# Altium PCB LimeSDR-Mini_2v5_Rounded.PcbDoc (part 3 of 7)
Units mm, origin at the board's own origin, x right, y up, seen from the top; angles counter-clockwise.
Board outline 69 x 31.37 mm, 8 copper layers (Top, L2, L3, L4, L5, L6, L7, Bottom), stack 1.555 mm thick; 439 components, 294 nets, 1986 pads, 831 vias.
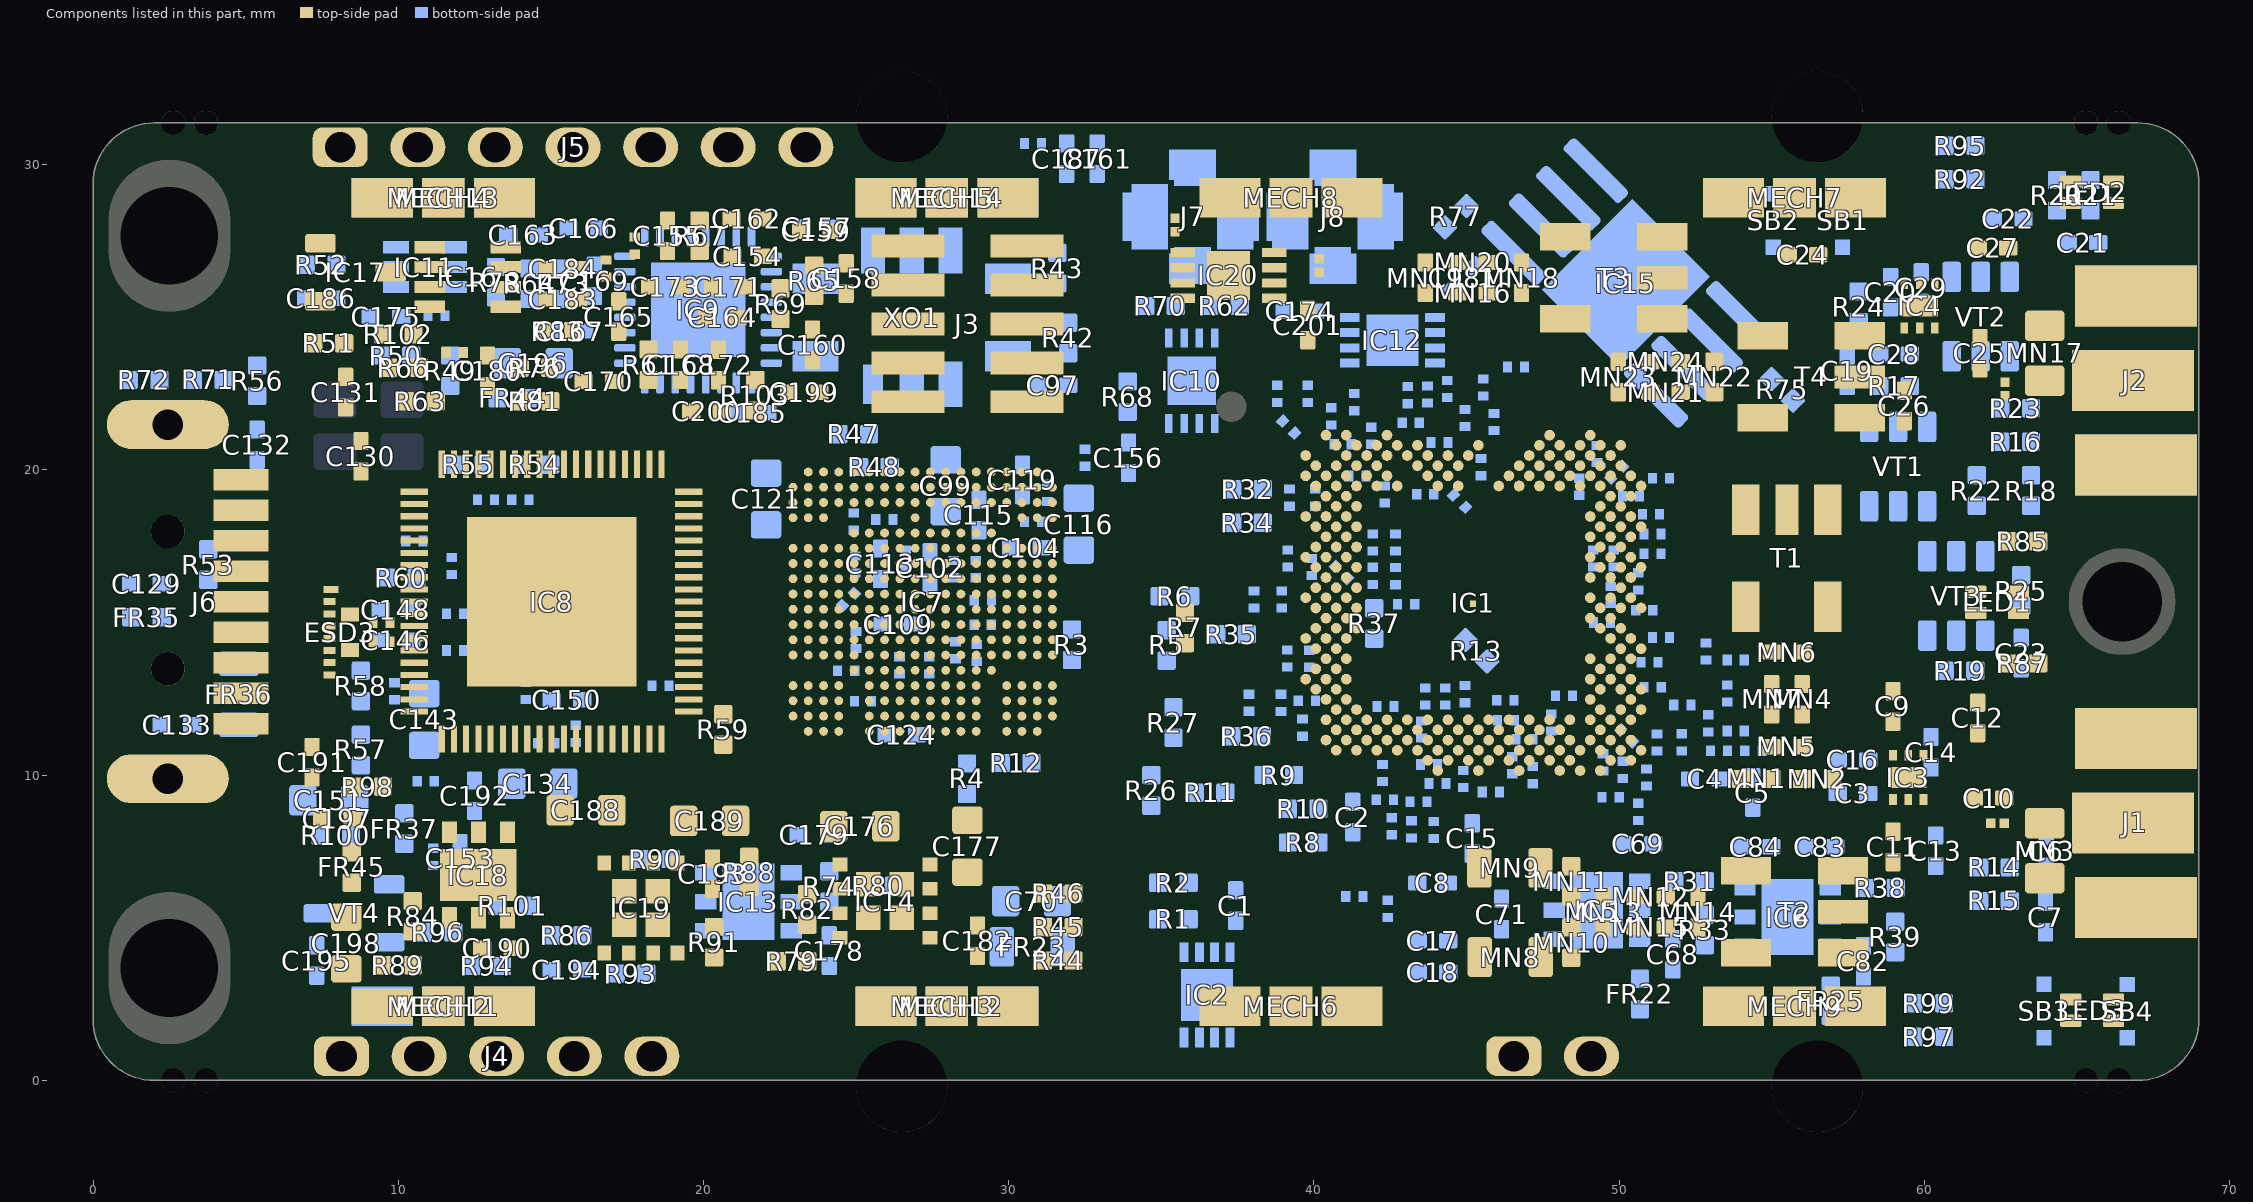
[diagram p8: the components of this part, seen from the top]

## Part data (continued)
IC14 IC19: library part LMZ20501SILR_DC-DC, Case/Package=SMD/SMT, Manufacturer="Texas Instruments", Max Input Voltage=5.5V, Max Operating Temperature=125°C, Max Output Current=1A, Max Power Dissipation=4W, Min Input Voltage=2.7V, Min Operating Temperature=-40°C, Output Voltage=3.6V, Package Quantity=3000, Quiescent Current=72nA, Supplier Part Number 1=296-40328-1-ND, Switching Frequency=3MHz, ComponentLink1Description=http://www.ti.com/lit/pdf/snaa214?src-supplier=Digi-Key, ComponentLink1URL=http://www.ti.com/lit/pdf/snaa214?src-supplier=Digi-Key, ComponentLink2Description=http://www.ti.com/lit/ds/symlink/lmz20501.pdf?src-supplier=Digi-Key, ComponentLink2URL=http://www.ti.com/lit/ds/symlink/lmz20501.pdf?src-supplier=Digi-Key, ComponentLink3Description=http://www.ti.com/lit/gpn/lmz20501?src-supplier=Mouser, ComponentLink3URL=http://www.ti.com/lit/gpn/lmz20501?src-supplier=Mouser, ComponentLink4Description=http://www.ti.com/general/docs/lit/getliterature.tsp?genericPartNumber=LMZ20501&&fileType=pdf&src-supplier=Avnet, ComponentLink4URL=http://www.ti.com/general/docs/lit/getliterature.tsp?genericPartNumber=LMZ20501&&fileType=pdf&src-supplier=Avnet, Efficiency=93%, Features=UVLO,OCP,OTP,SCP, Height=0.07inch, Lead Free="Lead Free", Length=0.14inch, Manufacturer Part Number 1=LMZ20501SILR, Mount="Surface Mount", Number of Outputs=1, Number of Pins=8, Operating Supply Voltage=5.5V, Output Type=Adjustable, Packaging="Tape and Reel", Part Description="Non-Isolated PoL Module DC DC Converter 1 Output 0.8 ~ 3.6V 1A 2.7V - 5.5V Input", Pricing 1="1=4,48000, 10=4,02000, 25=3,80040, 100=3,29350, 250=3,12464, 500=2,80372, 1000=2,54942 (USD)", RoHS=Yes, RoHS Compliant=Yes, Stock 1=8106, Supplier 1=Digi-Key, Voltage - Output 1=3.6V, Width=0.14inch
IC15: library part M25P40_with_pad, Case/Package=SOIC, Frequency=104MHz, Manufacturer=Winbond, Max Operating Temperature=85°C, Min Operating Temperature=-40°C, Supplier Part Number 1=W25Q128JVSIQ-ND, ComponentLink1Description=http://www.winbond.com/resource-files/w25q128jv%20revf%2003272018%20plus.pdf?src-supplier=Digi-Key, ComponentLink1URL=http://www.winbond.com/resource-files/w25q128jv%20revf%2003272018%20plus.pdf?src-supplier=Digi-Key, Interface=SPI,Serial, Manufacturer Part Number 1=W25Q128JVSIQ, Memory Type=FLASH,NOR, Packaging=Tray, Part Description="FLASH - NOR Memory IC 128Mb (16M x 8) SPI - Quad I/O, QPI, DTR 133 MHz 8-SOIC", Pricing 1="1=1,88000, 10=1,71400, 25=1,66760, 50=1,65880, 100=1,48280, 250=1,47852, 500=1,45618, 1000=1,39437, 5000=1,29820 (USD)", RoHS=Yes, RoHS Compliant=Yes, Stock 1=7729, Supplier 1=Digi-Key
IC16: Manufacturer="Analog Devices Inc.", Manufacturer Part Number 1=AD5662BRJZ-2REEL7, Operating Temperature="-40°C ~ 125°C", Package / Case=SOT-23-8, Supplier Part Number 1=AD5662BRJZ-2REEL7CT-ND, Voltage - Supply, Analog="2.7 V ~ 5.5 V", Architecture="String DAC", Assembly Info=NF, Category="Integrated Circuits (ICs)", ComponentLink1Description=http://www.analog.com/media/en/technical-documentation/data-sheets/AD5662.pdf, ComponentLink1URL=http://www.analog.com/media/en/technical-documentation/data-sheets/AD5662.pdf, Data Interface="SPI, DSP", Differential Output=No, INL/DNL (LSB)="±8, ±1 (Max)", Number of Bits=16, Number of D/A Converters=1, Output Type="Voltage - Buffered", Packaging="Cut Tape (CT)", Part Description="IC DAC 16BIT BUFF V-OUT SOT23-8", Part Status=Active, Pricing 1="1=7.55, 10=6.821, 100=5.6469, 500=4.91722, 1000=4.28274 (USD)", Reference Type=External, RoHS="RoHS Compliant", Settling Time=10µs, Stock 1=2784, Supplier 1=Digi-Key, Supplier Device Package=SOT-23-8, Voltage - Supply, Digital="2.7 V ~ 5.5 V"
IC17: library part VOLTAGE_REFERENCE_UNIVERSAL, Case/Package=TO-236-3, Cathode Current=1mA, Manufacturer=Diodes, Manufacturer Part Number 1=AS431ANTR-G1, Max Input Voltage=36V, Max Operating Temperature=125°C, Max Output Current=100mA, Min Operating Temperature=-40°C, Min Output Voltage=2.5V, Package Quantity=3000, Supplier Part Number 1=AS431ANTR-G1DICT-ND, Temperature Coefficient=20ppm/°C, Tolerance=0.5%, Assembly Info=NF, ComponentLink1Description=https://datasheet.ciiva.com/1177/1643148-1177233.pdf?src-supplier=Avnet, ComponentLink1URL=https://datasheet.ciiva.com/1177/1643148-1177233.pdf?src-supplier=Avnet, ComponentLink2Description=https://datasheet.ciiva.com/30002/as431-30002029.pdf?src-supplier=Avnet, ComponentLink2URL=https://datasheet.ciiva.com/30002/as431-30002029.pdf?src-supplier=Avnet, ComponentLink3Description=https://datasheet.ciiva.com/29572/as431-29572149.pdf?src-supplier=Digi-Key, ComponentLink3URL=https://datasheet.ciiva.com/29572/as431-29572149.pdf?src-supplier=Digi-Key, ComponentLink4Description=https://datasheet.ciiva.com/29572/as431-29572150.pdf?src-supplier=Digi-Key, ComponentLink4URL=https://datasheet.ciiva.com/29572/as431-29572150.pdf?src-supplier=Digi-Key, Max Output Voltage=36V, Mount="Surface Mount", Number of Pins=3, Output Current=100mA, Output Type=Adjustable, Output Voltage=36V, Packaging="Tape and Reel", Part Description="Shunt Voltage Reference IC Adjustable 2.5V 36 VV ±0.5% 100 mA SOT-23-3", Pricing 1="1=0,36000, 10=0,27000, 25=0,23600, 100=0,15270, 250=0,12640, 500=0,10112, 1000=0,07753 (USD)", Radiation Hardening=No, Reference Type=Shunt, RoHS=Yes, RoHS Compliant=Yes, Stock 1=792556, Supplier 1=Digi-Key
IC20: library part ATECC508A_authentication_IC, Manufacturer=Microchip, Manufacturer Part Number 1=ATECC508A-MAHDA-S, Supplier Part Number 1=ATECC508A-MAHDA-SDKR-ND, Part Description="Authentication Chip IC Networking and Communications 8-UDFN (2x3)", Pricing 1="1=0.73, 25=0.7064 (USD)", Stock 1=27941, Supplier 1=Digi-Key
J1 J2: library part RF_IF_connector, "CONN SMA JACK STR 50OHM EDGE MNT", Dielectric Material=-, Manufacturer="RF Solutions", Manufacturer Part Number 1=CON-SMA-EDGE-S, Supplier Part Number 1=CON-SMA-EDGE-S-ND, Body Finish=-, Body Material=-, Cable Group=-, Category="Connectors, Interconnects", Center Contact Material=-, Center Contact Plating=-, ComponentLink1Description=http://media.digikey.com/pdf/Data%20Sheets/RF%20Solutions%20PDFs/CON-SMA-EDGE.pdf, ComponentLink1URL=http://media.digikey.com/pdf/Data%20Sheets/RF%20Solutions%20PDFs/CON-SMA-EDGE.pdf, Connector Style=SMA, Connector Type="Jack, Female Socket", Contact Termination=Solder, Fastening Type=Threaded, Features=-, Frequency - Max=-, Housing Color=-, Impedance=-, Includes=-, Ingress Protection=-, Insertion Loss=-, Mating Cycles=-, Mounting Feature=-, Mounting Type="Board Edge, End Launch", Operating Temperature=-, Packaging=-, Part Description="SMA Connector Jack, Female Socket Board Edge, End Launch Solder", Part Status=Active, Pricing 1="1=2.1 (USD)", RoHS="RoHS Compliant", Shield Termination=Solder, Stock 1=1751, Supplier 1=Digi-Key, Voltage Rating=-
J3: library part "Header 5X2_SWD", "Header, 5-Pin, Dual row", Color=Black, Manufacturer="Harwin Inc", Manufacturer Part Number 1=M50-3600542, Supplier Part Number 1=952-1389-ND, Assembly Info=NF, Category="Connectors, Interconnects", Connector Type=Unshrouded, Contact Finish=Gold, Contact Finish Thickness="3µin (0.08µm)", Contact Mating Length="0.118\" (3.00mm)", Features=-, Height Stacking (Mating)=-, Molding Height Above Board="0.039\" (1.00mm)", Mounting Type="Surface Mount", Number of Positions=10, Number of Positions Loaded=All, Number of Rows=2, Packaging=Bulk, Part Description="CONN HDR 1.27MM SMD AU 10POS", Pitch="0.050\" (1.27mm)", RoHS="RoHS Compliant", Row Spacing="0.050\" (1.27mm)", Supplier 1=Digi-Key, Termination=Solder
J4: library part Header5P, "Header, 5-pin", Current Rating=-, Insulation Color=Black, Manufacturer="Amphenol FCI", Manufacturer Part Number 1=69190-405HLF, Material Flammability Rating="UL94 V-0", Supplier Part Number 1=609-4726-ND, Applications=-, Assembly Info=NF, Category="Connectors, Interconnects", ComponentLink1Description=http://portal.fciconnect.com/Comergent//fci/drawing/69190.pdf, ComponentLink1URL=http://portal.fciconnect.com/Comergent//fci/drawing/69190.pdf, Connector Type=Header, Contact Finish - Mating=Tin, Contact Finish - Post=Tin, Contact Finish Thickness - Mating="100µin (2.54µm)", Contact Finish Thickness - Post=-, Contact Length - Mating="0.230\" (5.84mm)", Contact Length - Post="0.120\" (3.05mm)", Contact Material="Phosphor Bronze", Contact Shape=Square, Contact Type="Male Pin", Fastening Type=Push-Pull, Features=-, Ingress Protection=-, Insulation Height="0.100\" (2.54mm)", Insulation Material="Polycyclohexylenedimethylene Terephthalate (PCT), Glass Filled", Mated Stacking Heights=-, Mounting Type="Through Hole", Number of Positions=5, Number of Positions Loaded=All, Number of Rows=1, Operating Temperature=-, Overall Contact Length="0.450\" (11.43mm)", Packaging=Bulk, Part Description="5 Positions Header Connector 0.100\" (2.54mm) Through Hole Tin", Part Status=Active, Pitch - Mating="0.100\" (2.54mm)", Pricing 1="1=0.28, 10=0.26, 100=0.1799, 500=0.15224, 1000=0.12456, 5000=0.11072, 10000=0.10034 (USD)", RoHS="RoHS Compliant", Row Spacing - Mating=-, Shrouding=Unshrouded, Stock 1=2326, Style="Board to Board", Supplier 1=Digi-Key, Termination="Press-Fit, Solder", Voltage Rating=-
J5: library part Header7P, "Header, 7-pin", Color=Black, Manufacturer="Sullins Connector Solutions", Manufacturer Part Number 1=PEC07SAAN, Supplier Part Number 1=S1012E-07-ND, Assembly Info=NF, Category="Connectors, Interconnects", Connector Type="Header, Unshrouded, Breakaway", Contact Finish=Tin, Contact Finish Thickness="100µin (2.54µm)", Contact Mating Length="0.230\" (5.84mm)", Contact Type="Male Pin", Fastening Type=-, Features=-, Mounting Type="Through Hole", Number of Positions=7, Number of Positions Loaded=All, Number of Rows=1, Packaging=Bulk, Part Description="7 Positions Header, Unshrouded, Breakaway Connector 0.100\" (2.54mm) Through Hole Tin", Pitch="0.100\" (2.54mm)", RoHS="RoHS Compliant", Row Spacing=-, Supplier 1=Digi-Key, Termination=Solder
J6: Current Rating="0.25A, 1.8A", Insulation Color=Blue, Manufacturer="Wurth Electronics Inc.", Manufacturer Part Number 1=692112030100, Material Flammability Rating="UL94 V-0", Operating Temperature="-20°C ~ 85°C", Supplier Part Number 1=732-3157-ND, Voltage - Rated=30VAC, Category="Connectors, Interconnects", ComponentLink1Description=http://katalog.we-online.de/em/datasheet/692112030100.pdf, ComponentLink1URL=http://katalog.we-online.de/em/datasheet/692112030100.pdf, Connector Type="USB - A", Contact Finish=Gold, Features="Board Guide, Board Lock", Gender=Plug, Ingress Protection=-, Mating Cycles=5000, Mounting Feature=Horizontal, Mounting Type="Surface Mount, Right Angle", Number of Contacts=9, Number of Ports=1, Packaging=Tray, Part Description="USB - A USB 3.0 (USB 3.1 Gen 1, Superspeed) Plug Connector 9 Position Surface Mount, Right Angle", Part Status=Active, Pricing 1="1=3, 10=2.65, 50=2.497, 100=2.242, 500=2.03802 (USD)", RoHS="RoHS Compliant", Shell/Shielding Material=Steel, Shielding=Shielded, Specifications="USB 3.0 (USB 3.1 Gen 1, Superspeed)", Stock 1=2119, Supplier 1=Digi-Key, Termination=Solder
J7 J8: library part RF_IF_connector, "CONN UMC RCPT STR 50 OHM SMD", Dielectric Material="Liquid Crystal Polymer (LCP)", Frequency - Max=6GHz, Housing Color=Silver, Manufacturer="Molex, LLC", Manufacturer Part Number 1=0734120110, Operating Temperature="-40°C ~ 90°C", Supplier Part Number 1=WM5587CT-ND, Voltage Rating=60V, Body Finish=Nickel, Body Material="Phosphor Bronze", Cable Group=-, Category="Connectors, Interconnects", Center Contact Material=Brass, Center Contact Plating=Gold, Connector Style="Ultra Miniature Coaxial", Connector Type="Jack, Male Pin", Contact Termination=Solder, Fastening Type=Snap-On, Features=-, Impedance="50 Ohm", Ingress Protection=-, Mounting Type="Surface Mount", Packaging="Cut Tape (CT)", Part Description="Ultra Miniature Coaxial Connector Receptacle, Male Pin 50 Ohm Surface Mount Solder", RoHS="RoHS Compliant", Shield Termination=Solder, Supplier 1=Digi-Key
J9: library part Jumper, Color=Black, Manufacturer=3M, Manufacturer Part Number 1=961102-6404-AR, Supplier Part Number 1=3M9447-ND, Assembly Info=NF, Category="Connectors, Interconnects", Connector Type="Header, Unshrouded", Contact Finish=Gold, Contact Type="Male Pin", Mounting Type="Through Hole", Part Description="2 Positions Header, Unshrouded Connector 0.100\" (2.54mm) Through Hole Gold", Supplier 1=Digi-Key
LED1 LED2 LED3: library part LED_green_red_SMD, Color="Green, Red", Current - Test=20mA, Lens Color=White, Manufacturer="Avago Technologies US Inc.", Manufacturer Part Number 1=HSMF-C165, Millicandela Rating="15mcd Green, 10mcd Red", Package / Case="0603 (1608 Metric)", Supplier Part Number 1=516-1419-1-ND, Voltage - Forward (Vf) (Typ)="2.2V Green, 1.95V Red", Category=Optoelectronics, Height (Max)=0.50mm, Lens Style/Size="Rectangle with Flat Top, 1.60mm x 0.80mm", Lens Transparency=Diffused, Mounting Type="Surface Mount", Packaging="Cut Tape (CT)", Part Description="LED GREEN/RED DIFFUSED 0603 SMD", RoHS="RoHS Compliant", Size / Dimension="1.60mm L x 0.80mm W", Supplier 1=Digi-Key, Viewing Angle=120°, Wavelength - Dominant="572nm Green, 621nm Red", Wavelength - Peak="570nm Green, 636nm Red"
MECH1 MECH10 MECH15: library part RFI_SHIELD_1, IP Rating=-, Manufacturer="WURTH ELEKTRONIK", Manufacturer Part Number 1=36003250, Supplier Part Number 1=1909662, Enclosure Material="Tin Plate", Enclosure Type="Shielding Cabinet", External Depth - Imperial="0.12\"", External Depth - Metric=3, External Height - Imperial="0.98\"", External Height - Metric=25, External Width - Imperial="0.98\"", External Width - Metric=25, NEMA Rating=-, Part Description="Enclosure, Shielding Cabinet Cover, Shielding Cabinet, 25 mm, 25 mm, 3 mm, Tin Plate", RoHS=YES, Supplier=Farnell, Supplier 1=Farnell
  MECH1 MECH15: Assembly Info=NF
MECH2 MECH3 MECH4 MECH5 MECH6 MECH7 MECH8 MECH9 MECH11 MECH12 MECH13 MECH14: library part RFI_SHIELD_CLIP, Manufacturer=HARWIN, Manufacturer Part Number 1=S0971-46R, Supplier Part Number 1=2361677, Clip Diameter=-, Clip Type="RFI Shield Clip", Length=5.8, Mounting Hole Dia=-, Part Description="RFI SHIELD CLIP MINI TIN SMD", Product Range=-, RoHS=YES, Supplier=Farnell, Supplier 1=Farnell, SVHC="No SVHC (15-Jun-2015)"
  MECH2 MECH3 MECH4 MECH5 MECH11 MECH12 MECH13 MECH14: Assembly Info=NF
MN1 MN2 MN22: library part Inductor_0603, DC Current Rating=1.5, DC Resistance Max=0.065, High Frequency Inductor Case="0402 [1005 Metric]", Inductance=8.2, Inductance Tolerance="± 5%", Inductor Case Style="0402 [1005 Metric]<!--FANDB--><div class=\"features-and-benefits-container\"></div>", Inductor Construction=Wirewound, Manufacturer=COILCRAFT, Manufacturer Part Number 1=0402HP-8N2XJLU, Self Resonant Frequency Min=5.4, Supplier Part Number 1=2285826, Packaging="Cut Tape", Part Description="Surface Mount High Frequency Inductor, 0402HP Series, 8.2 nH, ± 5%, 0402 [1005 Metric], 5.4 GHz", Product Range="COILCRAFT - 0402", RoHS=Y-EX, Supplier 1=Farnell, SVHC="No SVHC (16-Jun-2014)"
  MN22: Assembly Info=NF
MN3 MN8 MN9 MN17: library part Inductor_0603, Current - Saturation=-, Current Rating=2mA, DC Resistance (DCR)="3.1 Ohm Max", Frequency - Self Resonant=7MHz, Frequency - Test=1MHz, Inductance=100µH, Manufacturer="TDK Corporation", Manufacturer Part Number 1=MLF2012C101KT000, Operating Temperature="-40°C ~ 85°C", Package / Case="0805 (2012 Metric)", Q @ Freq="25 @ 1MHz", Supplier Part Number 1=445-1071-1-ND, Tolerance=±10%, Category="Inductors, Coils, Chokes", Height - Seated (Max)="0.057\" (1.45mm)", Material - Core=Ferrite, Mounting Type="Surface Mount", Packaging="Cut Tape (CT)", Part Description="FIXED IND 100UH 2MA 3.1 OHM SMD", RoHS="RoHS Compliant", Shielding=Shielded, Size / Dimension="0.079\" L x 0.049\" W (2.00mm x 1.25mm)", Supplier 1=Digi-Key, Supplier Device Package="0805 (2012 Metric)", Type=Multilayer
  MN3 MN17: Assembly Info=NF
MN4 MN7: library part Cap_0402, Capacitance=0.80pF, Manufacturer="Murata Electronics North America", Manufacturer Part Number 1=GRM1555C1HR80BA01D, Operating Temperature="-55°C ~ 125°C", Package / Case="0402 (1005 Metric)", Ratings=-, Supplier Part Number 1=490-6269-1-ND, Temperature Coefficient="C0G, NP0", Tolerance=±0.1pF, Voltage - Rated=50V, Applications="General Purpose", Category=Capacitors, Features=-, Height - Seated (Max)=-, Lead Spacing=-, Lead Style=-, Mounting Type="Surface Mount, MLCC", Packaging="Cut Tape (CT)", Part Description="0.80pF ±0.1pF 50V C0G, NP0 Ceramic Capacitor -55°C ~ 125°C Surface Mount, MLCC 0402 (1005 Metric) 0.039\" L x 0.020\" W (1.00mm x 0.50mm)", RoHS="RoHS Compliant", Size / Dimension="0.039\" L x 0.020\" W (1.00mm x 0.50mm)", Supplier 1=Digi-Key, Thickness (Max)="0.022\" (0.55mm)"
MN5 MN13 MN19: library part Cap_0402, Manufacturer="TDK Corporation", Manufacturer Part Number 1=C1005C0G1H010B050BA, Operating Temperature="-55°C ~ 125°C", Package / Case="0402 (1005 Metric)", Ratings=-, Supplier Part Number 1=445-4854-6-ND, Temperature Coefficient="C0G, NP0", Tolerance=±0.1pF, Voltage - Rated=50V, Applications="General Purpose", Capacitance=1pF, Category=Capacitors, Features=-, Height - Seated (Max)=-, Lead Spacing=-, Lead Style=-, Mounting Type="Surface Mount, MLCC", Packaging=Digi-Reel®, Part Description="1pF ±0.1pF 50V C0G, NP0 Ceramic Capacitor -55°C ~ 125°C Surface Mount, MLCC 0402 (1005 Metric) 0.039\" L x 0.020\" W (1.00mm x 0.50mm)", RoHS="RoHS Compliant", Size / Dimension="0.039\" L x 0.020\" W (1.00mm x 0.50mm)", Supplier 1=Digi-Key, Thickness (Max)="0.022\" (0.55mm)"
  MN5 MN13: Assembly Info=NF
MN6 MN18: library part Cap_0402, Capacitance=0.50pF, Manufacturer=Yageo, Manufacturer Part Number 1=CC0402CRNPO9BNR50, Operating Temperature="-55°C ~ 125°C", Package / Case="0402 (1005 Metric)", Ratings=-, Supplier Part Number 1=311-1001-1-ND, Temperature Coefficient="C0G, NP0", Tolerance=±0.25pF, Voltage - Rated=50V, Applications="General Purpose", Category=Capacitors, Features=-, Height - Seated (Max)=-, Lead Spacing=-, Lead Style=-, Mounting Type="Surface Mount, MLCC", Packaging="Cut Tape (CT)", Part Description="0.50pF ±0.25pF 50V C0G, NP0 Ceramic Capacitor -55°C ~ 125°C Surface Mount, MLCC 0402 (1005 Metric) 0.039\" L x 0.020\" W (1.00mm x 0.50mm)", RoHS="RoHS Compliant", Size / Dimension="0.039\" L x 0.020\" W (1.00mm x 0.50mm)", Supplier 1=Digi-Key, Thickness (Max)="0.022\" (0.55mm)"
  MN18: Assembly Info=NF
MN10 MN11 R14 R15 R20 R21 R26 R27 R32 R34 R35 R36 R37 R42 R43 R44 R45 R46 R53 R61 R65 R66 R69 R78 R90 R94 R96 R98 R100 R101 R102: library part Res_0402, Manufacturer=Yageo, Manufacturer Part Number 1=RC0402JR-070RL, Operating Temperature="-55°C ~ 155°C", Package / Case="0402 (1005 Metric)", Power (Watts)="0.063W, 1/16W", Resistance (Ohms)=0.0, Supplier Device Package=0402, Supplier Part Number 1=311-0.0JRTR-ND, Temperature Coefficient=-, Tolerance=Jumper, Category=Resistors, Composition="Thick Film", Features="Moisture Resistant", Height="0.016\" (0.40mm)", Number of Terminations=2, Packaging="Tape & Reel (TR)", Part Description="RES SMD 0.0OHM JUMPER 1/16W 0402", RoHS="RoHS Compliant", Size / Dimension="0.039\" L x 0.020\" W (1.00mm x 0.50mm)", Supplier 1=Digi-Key
  R14 R15 R20 R21 R26 R43 R66 R78 R96 R100 R101 R102: Assembly Info=NF
MN14 MN16 MN20: library part Cap_0402, Capacitance=2, Capacitance Tolerance="± 0.1", Ceramic Capacitor Case="0402 [1005 Metric]", Dielectric Characteristic="C0G / NP0", Manufacturer=AVX, Manufacturer Part Number 1=04025U2R0BAT2A, Operating Temperature Max=125, Operating Temperature Min=-55, Supplier Part Number 1=2332536, Voltage Rating=50, Capacitance Tolerance ±="± 0.1", MSL="MSL 1 - Unlimited", Packaging="Cut Tape", Part Description="SMD Multilayer Ceramic Capacitor, U Series, 2 pF, ± 0.1pF, C0G / NP0, 50 V, 0402 [1005 Metric]", Product Range="U Series", RoHS=YES, Supplier 1=Farnell, SVHC="No SVHC (17-Dec-2014)"
MN23: library part Cap_0402, Manufacturer="Murata Electronics North America", Manufacturer Part Number 1=GRM1555C1H1R2CA01D, Operating Temperature="-55°C ~ 125°C", Package / Case="0402 (1005 Metric)", Ratings=-, Supplier Part Number 1=490-5927-1-ND, Temperature Coefficient="C0G, NP0", Tolerance=±0.25pF, Voltage - Rated=50V, Applications="General Purpose", Capacitance=1.2pF, Category=Capacitors, Features=-, Height - Seated (Max)=-, Lead Spacing=-, Lead Style=-, Mounting Type="Surface Mount, MLCC", Packaging="Cut Tape (CT)", Part Description="'1.2pF ±0.25pF 50V C0G, NP0 Ceramic Capacitor -55°C ~ 125°C Surface Mount, MLCC 0402 (1005 Metric) 0.039\" L x 0.020\" W (1.00mm x 0.50mm)", RoHS="RoHS Compliant", Size / Dimension="0.039\" L x 0.020\" W (1.00mm x 0.50mm)", Supplier 1=Digi-Key, Thickness (Max)="0.022\" (0.55mm)"
R1 R2: library part Res_0402, Manufacturer="Stackpole Electronics Inc", Manufacturer Part Number 1=RMCF0402FT2K20, Operating Temperature="-55°C ~ 155°C", Package / Case="0402 (1005 Metric)", Power (Watts)="0.063W, 1/16W", Resistance (Ohms)=2.2k, Supplier Device Package=0402, Supplier Part Number 1=RMCF0402FT2K20CT-ND, Temperature Coefficient=±100ppm/°C, Tolerance=±1%, Category=Resistors, Composition="Thick Film", Features=-, Height="0.016\" (0.40mm)", Number of Terminations=2, Packaging="Cut Tape (CT)", Part Description="RES SMD 2.2K OHM 1% 1/16W 0402", RoHS="RoHS Compliant", Size / Dimension="0.039\" L x 0.020\" W (1.00mm x 0.50mm)", Supplier 1=Digi-Key
R3 R4 R5 R6 R7 R12 R13 R39 R54 R55 R56 R58 R62 R71 R73 R74 R77 R83 R84 R86: library part Res_0402, Manufacturer=Yageo, Manufacturer Part Number 1=RC0402FR-0710KL, Operating Temperature="-55°C ~ 155°C", Package / Case="0402 (1005 Metric)", Power (Watts)="0.063W, 1/16W", Resistance (Ohms)=10k, Supplier Device Package=0402, Supplier Part Number 1=311-10.0KLRTR-ND, Temperature Coefficient=±100ppm/°C, Tolerance=±1%, Category=Resistors, Composition="Thick Film", Features="Moisture Resistant", Height="0.016\" (0.40mm)", Number of Terminations=2, Packaging="Tape & Reel (TR)", Part Description="RES SMD 10K OHM 1% 1/16W 0402", RoHS="RoHS Compliant", Size / Dimension="0.039\" L x 0.020\" W (1.00mm x 0.50mm)", Supplier 1=Digi-Key
  R71 R83: Assembly Info=NF
R8 R9 R10 R11 R22 R23 R67 R103: library part Res_0402, Manufacturer="Samsung Electro-Mechanics America, Inc.", Manufacturer Part Number 1=RC1005F49R9CS, Operating Temperature="-55°C ~ 155°C", Package / Case="0402 (1005 Metric)", Power (Watts)="0.063W, 1/16W", Resistance (Ohms)=49.9, Supplier Part Number 1=1276-3469-6-ND, Temperature Coefficient=±100ppm/°C, Tolerance=±1%, Category=Resistors, Composition="Thick Film", Features=-, Height="0.016\" (0.40mm)", Number of Terminations=2, Packaging=Digi-Reel®, Part Description="RES SMD 49.9 OHM 1% 1/16W 0402", RoHS="RoHS Compliant", Size / Dimension="0.039\" L x 0.020\" W (1.00mm x 0.50mm)", Supplier 1=Digi-Key, Supplier Device Package="0402 (1005 Metric)"
R16: library part Res_0402, Manufacturer="Vishay Dale", Manufacturer Part Number 1=CRCW0402560RFKED, Operating Temperature="-55°C ~ 155°C", Package / Case="0402 (1005 Metric)", Power (Watts)="0.063W, 1/16W", Resistance (Ohms)=560, Supplier Part Number 1=541-560LCT-ND, Temperature Coefficient=±100ppm/°C, Tolerance=±1%, Assembly Info=NF, Category=Resistors, Composition="Thick Film", Features="Automotive AEC-Q200", Height="0.016\" (0.40mm)", Number of Terminations=2, Packaging="Cut Tape (CT)", Part Description="RES SMD 560 OHM 1% 1/16W 0402", RoHS="RoHS Compliant", Size / Dimension="0.039\" L x 0.020\" W (1.00mm x 0.50mm)", Supplier 1=Digi-Key, Supplier Device Package="0402 (1005 Metric)"
R17 R24 R25: library part Res_0402, Manufacturer="Stackpole Electronics Inc.", Manufacturer Part Number 1=RMCF0402FT100R, Package / Case="0402 (1005 Metric)", Supplier Part Number 1=RMCF0402FT100RDKR-ND, Temperature Coefficient=±100ppm/°C, Tolerance=±1%, Category=Resistors, Composition="Thick Film", Part Description="RES SMD 100 OHM 1% 1/16W 0402", Supplier 1=Digi-Key
  R17 R24: Assembly Info=NF
R18: library part Res_0402, Manufacturer=Yageo, Manufacturer Part Number 1=RC0402FR-072K49L, Operating Temperature="-55°C ~ 155°C", Package / Case="0402 (1005 Metric)", Power (Watts)="0.063W, 1/16W", Resistance (Ohms)=2.49k, Supplier Device Package=0402, Supplier Part Number 1=311-2.49KLRDKR-ND, Temperature Coefficient=±100ppm/°C, Tolerance=±1%, Category=Resistors, Composition="Thick Film", Features="Moisture Resistant", Height="0.016\" (0.40mm)", Number of Terminations=2, Packaging=Digi-Reel®, Part Description="RES SMD 2.49K OHM 1% 1/16W 0402", RoHS="RoHS Compliant", Size / Dimension="0.039\" L x 0.020\" W (1.00mm x 0.50mm)", Supplier 1=Digi-Key
R19 R63 R68 R70 R72 R75 R76 R81: library part Res_0402, Manufacturer="Stackpole Electronics Inc", Manufacturer Part Number 1=RMCF0402FT1K00, Operating Temperature="-55°C ~ 155°C", Package / Case="0402 (1005 Metric)", Power (Watts)="0.063W, 1/16W", Resistance (Ohms)=1k, Supplier Device Package=0402, Supplier Part Number 1=RMCF0402FT1K00TR-ND, Temperature Coefficient=±100ppm/°C, Tolerance=±1%, Category=Resistors, Composition="Thick Film", Height="0.016\" (0.40mm)", Number of Terminations=2, Part Description="RES SMD 1K OHM 1% 1/16W 0402", RoHS="RoHS Compliant", Size / Dimension="0.039\" L x 0.020\" W (1.00mm x 0.50mm)", Supplier 1=Digi-Key
  R19 R81: Assembly Info=NF, Features=-, Packaging="Tape & Reel (TR)"
  R63 R76: Assembly Info=NF, Features="Moisture Resistant", Packaging="Cut Tape (CT)"
  R68 R70 R72 R75: Features="Moisture Resistant", Packaging="Cut Tape (CT)"
R28 R29 R40 R41: library part Res_0402, Manufacturer="Panasonic Electronic Components", Manufacturer Part Number 1=ERJ-1GEF10R0C, Operating Temperature="-55°C ~ 125°C", Package / Case="0201 (0603 Metric)", Power (Watts)="0.05W, 1/20W", Resistance (Ohms)=10, Supplier Device Package=0201, Supplier Part Number 1=P10.0ABCT-ND, Temperature Coefficient=±200ppm/°C, Tolerance=±1%, Category=Resistors, Composition="Thick Film", Features=-, Height="0.010\" (0.26mm)", Number of Terminations=2, Packaging="Cut Tape (CT)", Part Description="RES SMD 10 OHM 1% 1/20W 0201", RoHS="RoHS Compliant", Size / Dimension="0.024\" L x 0.012\" W (0.60mm x 0.30mm)", Supplier 1=Digi-Key
R30: library part Res_0402, Manufacturer="Rohm Semiconductor", Manufacturer Part Number 1=RC0201FR-070RL, Operating Temperature="-55°C ~ 155°C", Package / Case="0201 (0603 Metric)", Power (Watts)="0.063W, 1/16W", Resistance (Ohms)=0.0, Supplier Device Package=0402, Supplier Part Number 1=311-0.0MCT-ND, Temperature Coefficient=-, Tolerance=Jumper, Category=Resistors, Composition="Thick Film", Features="Moisture Resistant", Height="0.016\" (0.40mm)", Number of Terminations=2, Packaging="Tape & Reel (TR)", Part Description="RES SMD 0.0OHM JUMPER 1/20W 0201", RoHS="RoHS Compliant", Size / Dimension="0.039\" L x 0.020\" W (1.00mm x 0.50mm)", Supplier 1=Digi-Key
R31: library part Res_0402, Manufacturer=Yageo, Manufacturer Part Number 1=RC0402FR-078K2L, Operating Temperature="-55°C ~ 155°C", Package / Case="0402 (1005 Metric)", Power (Watts)="0.063W, 1/16W", Resistance (Ohms)=8.2k, Supplier Device Package=0402, Supplier Part Number 1=311-8.20KLRCT-ND, Temperature Coefficient=±100ppm/°C, Tolerance=±1%, Category=Resistors, Composition="Thick Film", Features="Moisture Resistant", Height="0.016\" (0.40mm)", Number of Terminations=2, Packaging="Cut Tape (CT)", Part Description="RES SMD 8.2K OHM 1% 1/16W 0402", RoHS="RoHS Compliant", Size / Dimension="0.039\" L x 0.020\" W (1.00mm x 0.50mm)", Supplier 1=Digi-Key
R33: library part Res_0402, Manufacturer=Yageo, Manufacturer Part Number 1=RC0402FR-0715KL, Operating Temperature="-55°C ~ 155°C", Package / Case="0402 (1005 Metric)", Power (Watts)="0.063W, 1/16W", Resistance (Ohms)=15k, Supplier Device Package=0402, Supplier Part Number 1=311-15.0KLRCT-ND, Temperature Coefficient=±100ppm/°C, Tolerance=±1%, Category=Resistors, Composition="Thick Film", Failure Rate=-, Features="Moisture Resistant", Height - Seated (Max)="0.016\" (0.40mm)", Number of Terminations=2, Packaging="Cut Tape (CT)", Part Description="RES SMD 15K OHM 1% 1/16W 0402", Part Status=Active, RoHS="RoHS Compliant", Size / Dimension="0.039\" L x 0.020\" W (1.00mm x 0.50mm)", Supplier 1=Digi-Key
R38: library part Res_0402, Manufacturer=Yageo, Manufacturer Part Number 1=RC0402FR-077K5L, Operating Temperature="-55°C ~ 155°C", Package / Case="0402 (1005 Metric)", Power (Watts)="0.063W, 1/16W", Supplier Device Package=0402, Supplier Part Number 1=YAG3512CT-ND, Temperature Coefficient=±100ppm/°C, Tolerance=±1%, Category=Resistors, Composition="Thick Film", Failure Rate=-, Features="Moisture Resistant", Height - Seated (Max)="0.016\" (0.40mm)", Packaging="Cut Tape (CT)", Part Description="±1% 0.063W, 1/16W Chip Resistor 0402 (1005 Metric) Automotive AEC-Q200, Moisture Resistant Thick Film", Part Status=Active, RoHS="RoHS Compliant", Size / Dimension="0.039\" L x 0.020\" W (1.00mm x 0.50mm)", Supplier 1=Digi-Key
R47 R48 R49 R50 R51 R52 R57 R89 R93: library part Res_0402, Manufacturer=Yageo, Manufacturer Part Number 1=RC0402FR-074K7L, Operating Temperature="-55°C ~ 155°C", Package / Case="0402 (1005 Metric)", Power (Watts)="0.063W, 1/16W", Supplier Device Package=0402, Supplier Part Number 1=311-4.7KLRCT-ND, Temperature Coefficient=±100ppm/°C, Tolerance=±1%, Category=Resistors, ComponentLink1Description=http://www.yageo.com/documents/recent/PYu-RC_Group_51_RoHS_L_7.pdf, ComponentLink1URL=http://www.yageo.com/documents/recent/PYu-RC_Group_51_RoHS_L_7.pdf, Composition="Thick Film", Failure Rate=-, Features="Moisture Resistant", Height - Seated (Max)="0.016\" (0.40mm)", Packaging="Cut Tape (CT)", Part Description="±1% 0.063W, 1/16W Chip Resistor 0402 (1005 Metric) Moisture Resistant Thick Film", Part Status=Active, Pricing 1="1=0.1, 10=0.014, 100=0.0056, 1000=0.00253, 2500=0.0022, 5000=0.00181 (USD)", RoHS="RoHS Compliant", Size / Dimension="0.039\" L x 0.020\" W (1.00mm x 0.50mm)", Stock 1=4788231, Supplier 1=Digi-Key
  R93: Assembly Info=NF
R59 R64: library part Res_0402, Manufacturer=Yageo, Manufacturer Part Number 1=RC0402FR-0722RL, Resistance (Ohms)=22, Supplier Device Package=0402, Supplier Part Number 1=311-22.0LRTR-ND, Temperature Coefficient=±100ppm/°C, Tolerance=±1%, Category=Resistors, Composition="Thick Film", Part Description="RES SMD 22 OHM 1% 1/16W 0402", Supplier 1=Digi-Key
R60: library part Res_0402, Manufacturer=Yageo, Manufacturer Part Number 1=RC0402FR-071K6L, Operating Temperature="-55°C ~ 155°C", Package / Case="0402 (1005 Metric)", Power (Watts)="0.063W, 1/16W", Resistance (Ohms)=1.6k, Supplier Device Package=0402, Supplier Part Number 1=YAG3045CT-ND, Temperature Coefficient=±100ppm/°C, Tolerance=±1%, Category=Resistors, Composition="Thick Film", Features="Moisture Resistant", Height="0.016\" (0.40mm)", Number of Terminations=2, Packaging="Cut Tape (CT)", Part Description="RES SMD 1.6K OHM 1% 1/16W 0402", RoHS="RoHS Compliant", Size / Dimension="0.039\" L x 0.020\" W (1.00mm x 0.50mm)", Supplier 1=Digi-Key
R79: library part Res_0402, Case/Package=0402, Case Code (Metric)=1005, Manufacturer="Stackpole Electronics", Manufacturer Part Number 1=RMCF0402FT80K6, Max Operating Temperature=155°C, Max Power Dissipation=63mW, Min Operating Temperature=-55°C, Resistance=80.6kR, Resistor Type="Thick Film", Supplier Part Number 1=RMCF0402FT80K6CT-ND, Temperature Coefficient=100ppm/°C, Tolerance=1%, Case Code (Imperial)=0402, ComponentLink1Description=https://www.seielect.com/catalog/SEI-Packaging.pdf?src-supplier=Digi-Key, ComponentLink1URL=https://www.seielect.com/catalog/SEI-Packaging.pdf?src-supplier=Digi-Key, ComponentLink2Description=https://www.seielect.com/catalog/SEI-RMCF_RMCP.pdf?src-supplier=Avnet, ComponentLink2URL=https://www.seielect.com/catalog/SEI-RMCF_RMCP.pdf?src-supplier=Avnet, ComponentLink3Description=https://www.seielect.com/Catalog/SEI-RMCF_RMCP.pdf?src-supplier=Digi-Key, ComponentLink3URL=https://www.seielect.com/Catalog/SEI-RMCF_RMCP.pdf?src-supplier=Digi-Key, Contact Plating=Tin,Matte, Features="Automotive AEC-Q200", Height=0.016inch, Lead Free="Lead Free", Length=0.039inch, Mount="Surface Mount", Number of Terminations=2, Packaging="Tape and Reel", Part Description="80.6 kOhms ±1% 0.063W, 1/16W Chip Resistor 0402 (1005 Metric) Automotive AEC-Q200 Thick Film", Pricing 1="1=0,10000, 10=0,01300, 100=0,00550, 1000=0,00246, 2500=0,00213, 5000=0,00176 (USD)", Radiation Hardening=No, RoHS=Yes, RoHS Compliant=Yes, Series=RMCF, Stock 1=329079, Supplier 1=Digi-Key, Width=0.02inch
R80: library part Res_0402, Case/Package=0402, Case Code (Metric)=1005, Manufacturer=Yageo, Manufacturer Part Number 1=RC0402FR-0727KL, Max Operating Temperature=155°C, Max Power Dissipation=63mW, Min Operating Temperature=-55°C, Package Quantity=10000, Resistance=27kR, Resistance Tolerance=1%, Resistor Type="Thick Film", Supplier Part Number 1=311-27.0KLRCT-ND, Temperature Coefficient=100ppm/°C, Voltage Rating=50V, Case Code (Imperial)=0402, ComponentLink1Description=http://www.yageo.com/documents/recent/PYu-RC_Group_51_RoHS_L_7.pdf, ComponentLink1URL=http://www.yageo.com/documents/recent/PYu-RC_Group_51_RoHS_L_7.pdf, Construction=Rectangular, Depth=0.5mm, Features="Moisture Resistant", Height=0.016inch, Lead Free="Lead Free", Length=1mm, Military Standard=Not, Number of Terminations=2, Packaging="Tape and Reel", Part Description="27 kOhms ±1% 0.063W, 1/16W Chip Resistor 0402 (1005 Metric) Moisture Resistant Thick Film", Power Rating=63mW, Pricing 1="1=0,10000, 10=0,01600, 100=0,00660, 1000=0,00299, 2500=0,00259, 5000=0,00214 (USD)", REACH SVHC=Unknown, RoHS=Yes, RoHS Compliant=Yes, Series=RC, Size Code=0402, Stock 1=1102573, Supplier 1=Digi-Key, Technology="THICK FILM", Termination=SMD/SMT, Tolerance=1%, Width=0.02inch
R82: library part Res_0402, Case/Package=0402, Case Code (Metric)=1005, Manufacturer=Yageo, Manufacturer Part Number 1=RC0402FR-0740K2L, Max Operating Temperature=155°C, Max Power Dissipation=63mW, Min Operating Temperature=-55°C, Package Quantity=1, Power Rating=62.5mW, Resistance=40.2kR, Resistor Type="Thick Film", Supplier Part Number 1=311-40.2KLRCT-ND, Temperature Coefficient=100ppm/°C, Tolerance=1%, Voltage Rating=50V, Case Code (Imperial)=0402, ComponentLink1Description=https://datasheet.ciiva.com/2453/pyu-r-int-thick-7-2453437.pdf?src-supplier=Digi-Key, ComponentLink1URL=https://datasheet.ciiva.com/2453/pyu-r-int-thick-7-2453437.pdf?src-supplier=Digi-Key, ComponentLink2Description=https://datasheet.ciiva.com/2453/pyu-r-int-thick-7-2453438.pdf?src-supplier=Digi-Key, ComponentLink2URL=https://datasheet.ciiva.com/2453/pyu-r-int-thick-7-2453438.pdf?src-supplier=Digi-Key, ComponentLink3Description=https://datasheet.ciiva.com/2453/pyu-r-int-thick-7-2453436.pdf?src-supplier=Digi-Key, ComponentLink3URL=https://datasheet.ciiva.com/2453/pyu-r-int-thick-7-2453436.pdf?src-supplier=Digi-Key, ComponentLink4Description=https://datasheet.ciiva.com/5557/pyu-rc0402-51-rohs-l-6-r-5557981.pdf?src-supplier=Mouser, ComponentLink4URL=https://datasheet.ciiva.com/5557/pyu-rc0402-51-rohs-l-6-r-5557981.pdf?src-supplier=Mouser, ComponentLink5Description=https://datasheet.ciiva.com/8889/pyu-rc0402-51-rohs-l-6-8889263.pdf?src-supplier=Avnet, ComponentLink5URL=https://datasheet.ciiva.com/8889/pyu-rc0402-51-rohs-l-6-8889263.pdf?src-supplier=Avnet, ComponentLink6Description=https://datasheet.ciiva.com/16744/pyu-rc0402-51-rohs-l-6-r-16744286.pdf?src-supplier=Future+Electronics, ComponentLink6URL=https://datasheet.ciiva.com/16744/pyu-rc0402-51-rohs-l-6-r-16744286.pdf?src-supplier=Future+Electronics, Construction=Rectangular, Contact Plating=Tin,Matte, Depth=0.5mm, Features="Moisture Resistant", Height=0.016inch, Lead Free="Lead Free", Length=0.039inch, Military Standard=Not, Number of Terminations=2, Packaging="Tape and Reel", Part Description="40.2 kOhms ±1% 0.063W, 1/16W Chip Resistor 0402 (1005 Metric) Moisture Resistant Thick Film", Pricing 1="1=0,10000, 10=0,01500, 100=0,00600, 1000=0,00267, 2500=0,00232, 5000=0,00192 (USD)", RoHS=Yes, RoHS Compliant=Yes, Series=RC, Size Code=0402, Stock 1=2895359, Supplier 1=Digi-Key, Termination=SMD/SMT, Voltage Rating (DC)=50V, Width=0.02inch
R85 R87 R92 R95 R97 R99: library part Res_0402, Manufacturer="Stackpole Electronics Inc.", Manufacturer Part Number 1=RMCF0402FT100R, Operating Temperature="-55°C ~ 155°C", Package / Case="0402 (1005 Metric)", Power (Watts)="0.063W, 1/16W", Resistance (Ohms)=100, Supplier Device Package=0402, Supplier Part Number 1=RMCF0402FT100RDKR-ND, Temperature Coefficient=±100ppm/°C, Tolerance=±1%, Category=Resistors, Composition="Thick Film", Features=-, Height="0.016\" (0.40mm)", Number of Terminations=2, Packaging=Digi-Reel®, Part Description="RES SMD 100 OHM 1% 1/16W 0402", RoHS="RoHS Compliant", Size / Dimension="0.039\" L x 0.020\" W (1.00mm x 0.50mm)", Supplier 1=Digi-Key
R88: library part Res_0402, Case/Package=0402, Case Code (Metric)=1005, Manufacturer=Yageo, Manufacturer Part Number 1=RC0402FR-07237KL, Max Operating Temperature=155°C, Max Power Dissipation=63mW, Min Operating Temperature=-55°C, Power Rating=62.5mW, Resistance=237kR, Resistor Type="Thick Film", Supplier Part Number 1=YAG3064CT-ND, Temperature Coefficient=100ppm/°C, Tolerance=1%, Voltage Rating=50V, Case Code (Imperial)=0402, ComponentLink1Description=https://datasheet.ciiva.com/17419/pyu-rc0402-51-rohs-l-6-r-17419479.pdf?src-supplier=Future+Electronics, ComponentLink1URL=https://datasheet.ciiva.com/17419/pyu-rc0402-51-rohs-l-6-r-17419479.pdf?src-supplier=Future+Electronics, Construction=Rectangular, Contact Plating=Tin,Matte, Depth=0.5mm, Features="Moisture Resistant", Height=0.016inch, Lead Free="Lead Free", Length=1mm, Military Standard=Not, Number of Terminations=2, Packaging="Tape and Reel", Part Description="237 kOhms ±1% 0.063W, 1/16W Chip Resistor 0402 (1005 Metric) Moisture Resistant Thick Film", Pricing 1="1=0,10000, 10=0,01500, 100=0,00600, 1000=0,00267, 2500=0,00232, 5000=0,00192 (USD)", RoHS=Yes, RoHS Compliant=Yes, Series=RC, Size Code=0402, Stock 1=306971, Supplier 1=Digi-Key, Termination=SMD/SMT, Width=0.5mm
R91: library part Res_0402, Case/Package=0402, Case Code (Metric)=1005, Manufacturer=Panasonic, Manufacturer Part Number 1=ERJ-2RKF5232X, Max Operating Temperature=155°C, Max Power Dissipation=100mW, Min Operating Temperature=-55°C, Package Quantity=10000, Ratings=AEC-Q200, Resistance=52.3kR, Resistance Tolerance=1%, Resistor Type="Thick Film", Supplier Part Number 1=667-ERJ-2RKF5232X, Temperature Coefficient=100ppm/°C, Voltage Rating=50V, Case Code (Imperial)=0402, ComponentLink1Description=https://datasheet.ciiva.com/6067/1686128-6067913.pdf?src-supplier=Farnell, ComponentLink1URL=https://datasheet.ciiva.com/6067/1686128-6067913.pdf?src-supplier=Farnell, ComponentLink2Description=https://datasheet.ciiva.com/7983/1018594-7983494.pdf?src-supplier=Element14, ComponentLink2URL=https://datasheet.ciiva.com/7983/1018594-7983494.pdf?src-supplier=Element14, ComponentLink3Description=https://datasheet.ciiva.com/2453/pyu-r-int-thick-7-2453602.pdf?src-supplier=Digi-Key, ComponentLink3URL=https://datasheet.ciiva.com/2453/pyu-r-int-thick-7-2453602.pdf?src-supplier=Digi-Key, ComponentLink4Description=https://datasheet.ciiva.com/2453/pyu-r-int-thick-7-2453603.pdf?src-supplier=Digi-Key, ComponentLink4URL=https://datasheet.ciiva.com/2453/pyu-r-int-thick-7-2453603.pdf?src-supplier=Digi-Key, ComponentLink5Description=https://datasheet.ciiva.com/2453/pyu-r-int-thick-7-2453601.pdf?src-supplier=Digi-Key, ComponentLink5URL=https://datasheet.ciiva.com/2453/pyu-r-int-thick-7-2453601.pdf?src-supplier=Digi-Key, ComponentLink6Description=https://datasheet.ciiva.com/7849/1018594-7849837.pdf?src-supplier=Element14, ComponentLink6URL=https://datasheet.ciiva.com/7849/1018594-7849837.pdf?src-supplier=Element14, ComponentLink7Description=https://datasheet.ciiva.com/7849/1018594-7849836.pdf?src-supplier=Element14, ComponentLink7URL=https://datasheet.ciiva.com/7849/1018594-7849836.pdf?src-supplier=Element14, ComponentLink8Description=https://datasheet.ciiva.com/15189/getdatasheetpartid-326416-15189356.pdf?src-supplier=Verical, ComponentLink8URL=https://datasheet.ciiva.com/15189/getdatasheetpartid-326416-15189356.pdf?src-supplier=Verical, ComponentLink9Description=https://datasheet.ciiva.com/16741/pyu-rc0402-51-rohs-l-6-r-16741080.pdf?src-supplier=Future+Electronics, ComponentLink9URL=https://datasheet.ciiva.com/16741/pyu-rc0402-51-rohs-l-6-r-16741080.pdf?src-supplier=Future+Electronics, ComponentLink10Description=https://datasheet.ciiva.com/3883/3984280s8821682n1386-3883650.pdf?src-supplier=Arrow+Electronics, ComponentLink10URL=https://datasheet.ciiva.com/3883/3984280s8821682n1386-3883650.pdf?src-supplier=Arrow+Electronics, ComponentLink11Description=https://datasheet.ciiva.com/6201/426256-6201381.pdf?src-supplier=Farnell, ComponentLink11URL=https://datasheet.ciiva.com/6201/426256-6201381.pdf?src-supplier=Farnell, ComponentLink12Description=https://datasheet.ciiva.com/9188/aoa0000ce2-9188938.pdf?src-supplier=Avnet, ComponentLink12URL=https://datasheet.ciiva.com/9188/aoa0000ce2-9188938.pdf?src-supplier=Avnet, ComponentLink13Description=https://datasheet.ciiva.com/46389/426256-46389115.pdf?src-supplier=Element14, ComponentLink13URL=https://datasheet.ciiva.com/46389/426256-46389115.pdf?src-supplier=Element14, ComponentLink14Description=https://datasheet.ciiva.com/43460/426256-43460332.pdf?src-supplier=Farnell, ComponentLink14URL=https://datasheet.ciiva.com/43460/426256-43460332.pdf?src-supplier=Farnell, ComponentLink15Description=https://datasheet.ciiva.com/16781/70260748-16781070.pdf?src-supplier=Allied+Electronics, ComponentLink15URL=https://datasheet.ciiva.com/16781/70260748-16781070.pdf?src-supplier=Allied+Electronics, Construction=Rectangular, Contact Plating=Tin, Depth=0.5mm, Features="Automotive AEC-Q200", Height=0.35mm, Lead Free="Lead Free", Length=1mm, Military Standard=Not, Mount="Surface Mount", Number of Terminations=2, Packaging="Tape and Reel", Part Description="Thick Film Resistors - SMD 0402 52.3Kohms 1% AEC-Q20", Power Rating=100mW, Pricing 1="1=0,10000, 10=0,03400, 50=0,03400, 100=0,01400, 1000=0,00700, 10000=0,00400 (USD)", Reach SVHC Compliant=Yes, RoHS=Yes, RoHS Compliant=Yes, Series=ERJ, Stock 1=161816, Supplier 1=Mouser, Termination=SMD/SMT, Tolerance=1%, Voltage Rating (DC)=50V, Width=0.5mm